# Altium PCB Gen_Func.PcbDoc
Units mm, origin at the board's own origin, x right, y up, seen from the top; angles counter-clockwise.
Board outline 152.4 x 101.6 mm, 2 copper layers (Top Layer, Bottom Layer); 88 components, 66 nets, 292 pads, 61 vias.
Unrouted connection lines stored in the file: 64.
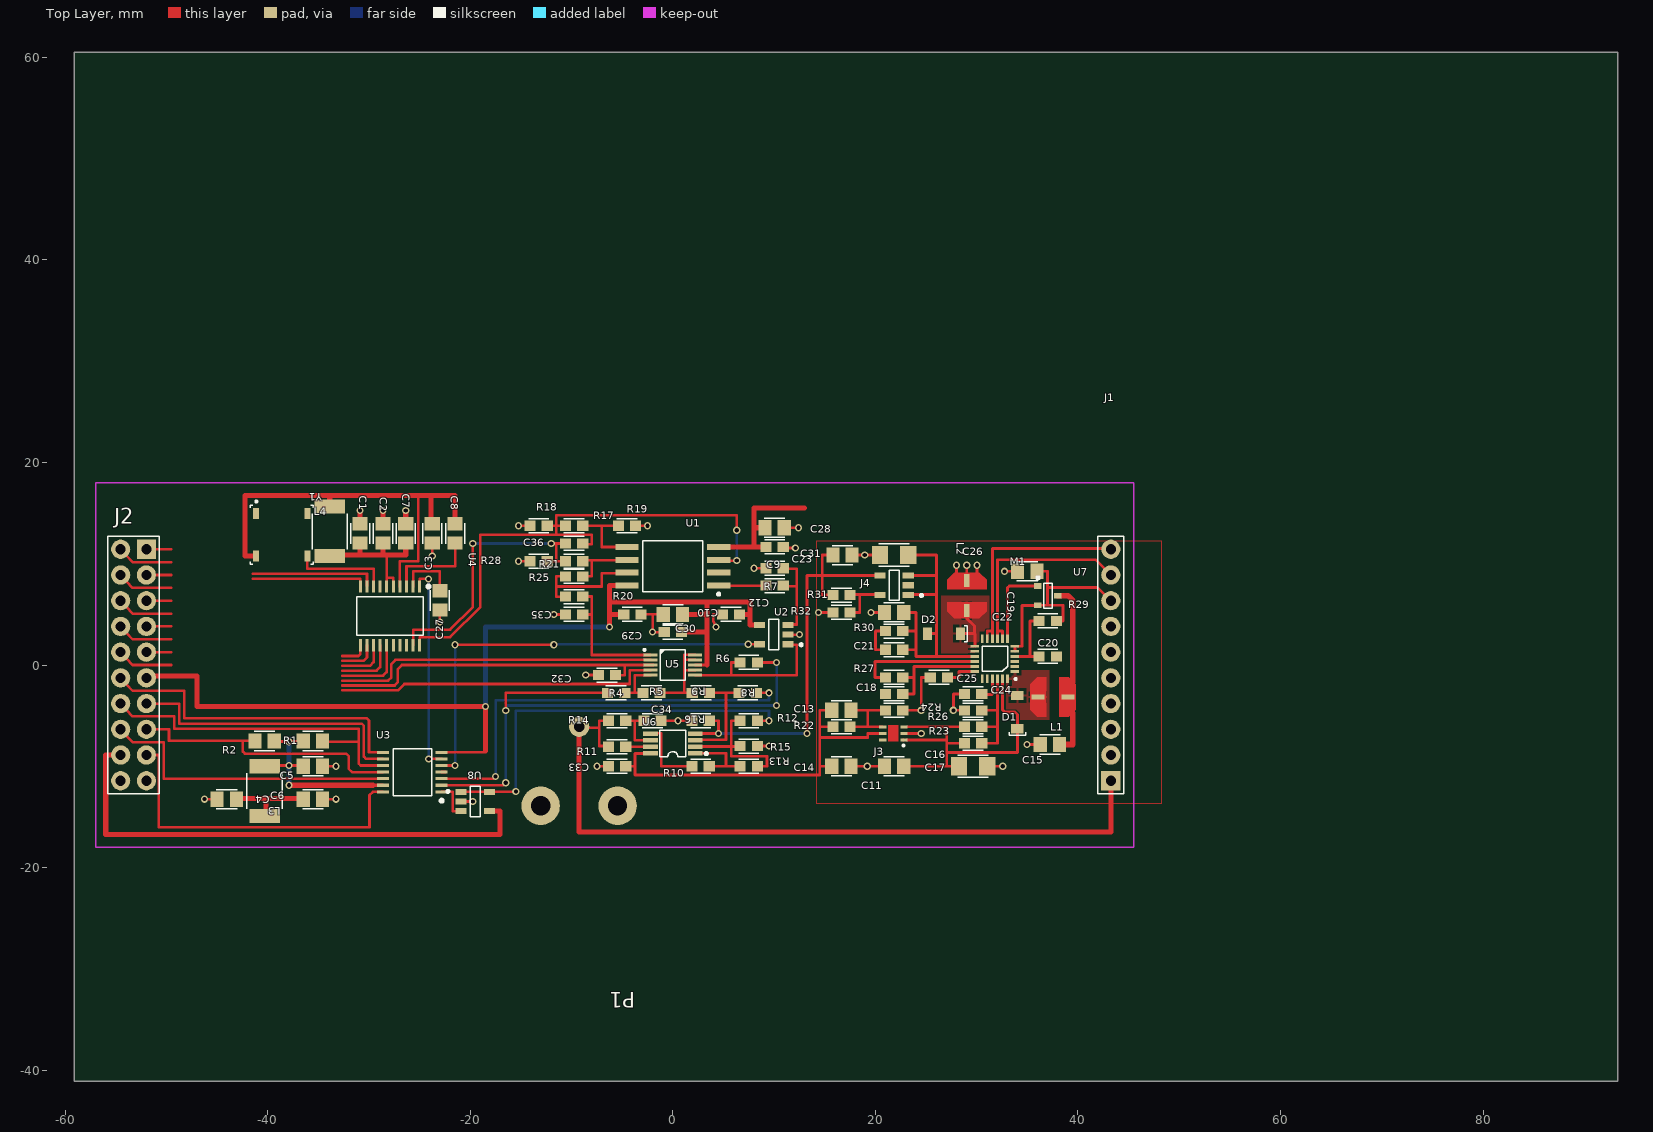
[diagram p0: Top Layer view]
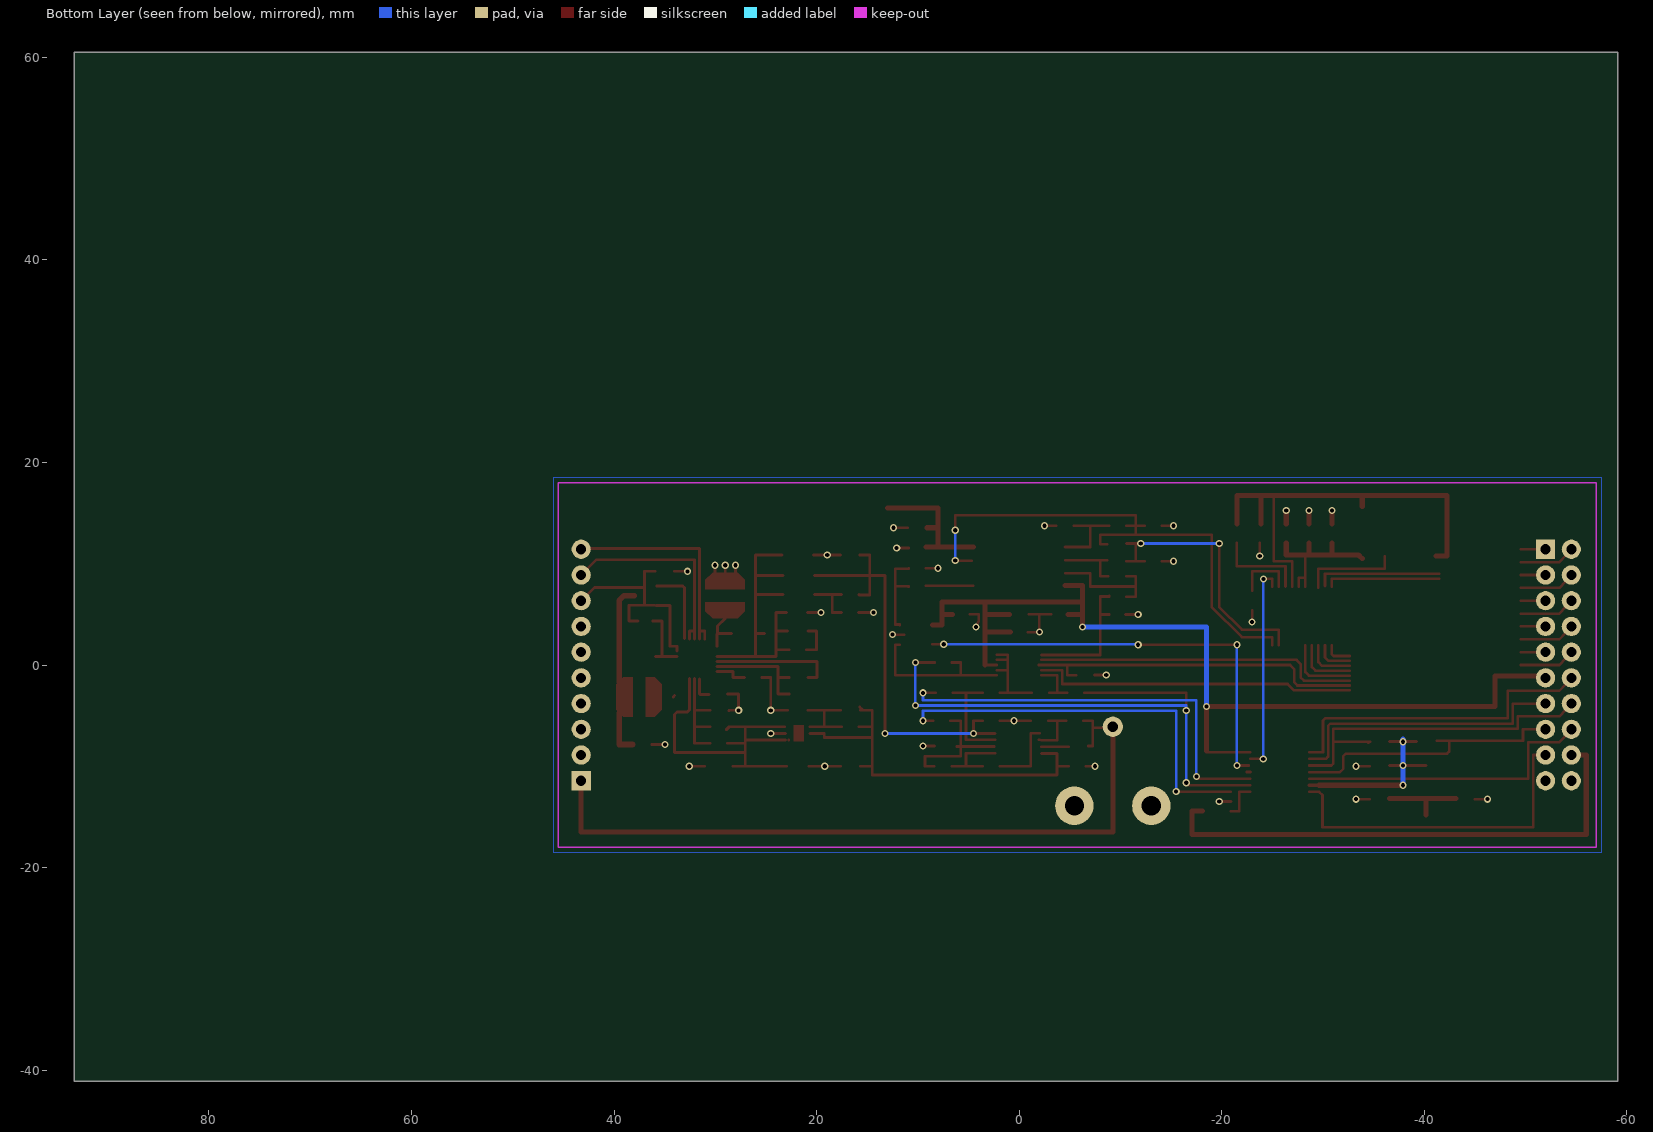
[diagram p1: Bottom Layer view, seen from below]

## Layer stack, top to bottom
Top Solder: solder mask 0.0102, Solder Resist, Dk 3.5
Top Layer: signal copper 0.0356
Dielectric 1: dielectric 0.32, FR-4, Dk 4.8
Bottom Layer: signal copper 0.0356
Bottom Solder: solder mask 0.0102, Solder Resist, Dk 3.5

## Board outline
-59.1,-41.1 93.3,-41.1 93.3,60.5 -59.1,60.5

## Design rules (kind name [scope] priority, off if disabled: settings)
Clearance [All] p1: gap=0.15
ComponentClearance [All] p1 off: gap=0.254 collisioncheckmode=3 verticalgap=0.254 showdistances=FALSE
PolygonConnect [All] p1: connectstyle=Relief reliefconductorwidth=0.254 reliefentries=4 polygonreliefangle="90 Angle" airgapwidth=0.254
RoutingVias [All] p1: holewidth=0.3 width=0.6 viastyle="Through Hole" minholewidth=0.3 minwidth=0.6 maxholewidth=6.3 maxwidth=10
SolderMaskExpansion [All] p1: expansion=0.102
UnpouredPolygon [All] p1: allowunpoured=FALSE
Width [All] p1: maxlimit=2.54 minlimit=0.102 preferedwidth=0.203 minimp=50.000000 maximp=50.000000 favimp=50.000000
28 further rules are at their usual default settings.

## Classes and differential pairs
component class Conectores: J1 J2 P1
component class Core_analógico: C9 C10 C12 C28 C29 C30 C31 C32 C33 C34 C35 C36 R4 R5 R6 R7 R8 R9 R10 R11 R12 R13 R14 R15 R16 R17 R18 R19 R20 R21 R25 R28 U1 U2 U5 U6
component class DDS: C1 C2 C3 C4 C5 C6 C7 C8 C27 L3 L4 R1 R2 U3 U4 U8 Y1
component class PowerSupply: C11 C13 C14 C15 C16 C17 C18 C19 C20 C21 C22 C23 C24 C25 C26 D1 D2 J3 J4 L1 L2 M1 R22 R23 R24 R26 R27 R29 R30 R31 R32 U7

## Components (designator, comment, footprint, x,y, rotation, side; value= is the part's Value field where it differs from the comment)
C1 "0.1μF 50V X7R" C_0805 -30.875,13 r270 top
C2 "1μF ±10% 10V Y5V" C_0805 -28.625,13 r270 top
C3 "0.1μF 50V X7R" C_0805 -23.75,13 r270 top
C4 "10uF Tantalum" C_0805 -44.05,-13.25 r180 top
C5 "0,1uF Ceramic" C_0805 -35.55,-10 r0 top
C6 "0,1uF Ceramic" C_0805 -35.55,-13.25 r0 top
C7 "0.1μF 50V X7R" C_0805 -26.375,13 r270 top
C8 "0.01μF 10V 0603 X5R" C_0805 -21.5,13 r270 top
C9 "Cap" C_0603 10.06,9.55 r180 top
C10 "6,8uF XR5 16V" C_0805 0,5 r180 top
C11 "1uF X5R" C_0805 21.85,-10 r180 top
C12 "0,1uF X5R 16V" C_0603 5.75,5 r180 top
C13 "100pF X5R" C_0805 16.65,-4.475 r0 top
C14 "2.2uF X5R" C_0805 16.65,-10 r0 top
C15 "4.7uF" C_0805 37.225,-7.85 r180 top
C16 "13pF" C_0603 29.65,-7.725 r180 top
C17 "22uF" C_1206 29.65,-10 r180 top
C18 "220nF" C_0603 21.85,-2.85 r180 top
C19 "4.7uF" C_0805 35,9.25 r180 top
C20 "100nF" C_0603 37.025,0.85 r0 top
C21 "10pF" C_0603 21.85,1.505 r180 top
C22 "2.2uF X5R" C_0805 21.85,5.195 r180 top
C23 "2.2uF X5R" C_0805 16.75,10.85 r0 top
C24 "10nF" C_0603 29.65,-2.85 r180 top
C25 "4.7nF" C_0603 26.275,-1.225 r180 top
C26 "22uF" C_1206 21.85,10.85 r180 top
C27 "0.1μF 50V X7R" C_0805 -23,6.375 r270 top
C28 "6,8uF XR5 16V" C_0805 10.06,13.555 r0 top
C29 "0,1uF X5R 16V" C_0603 0,3.25 r180 top
C30 "0,1uF X5R 16V" C_0603 -4,5 r0 top
C31 "0,1uF X5R 16V" C_0603 10.06,11.655 r0 top
C32 "0,1uF X5R 16V" C_0603 -6.5,-1 r180 top
C33 "0,1uF X5R 16V" C_0603 -5.5,-10 r180 top
C34 "0,1uF X5R 16V" C_0603 2.75,-5.5 r180 top
C35 "Cap" C_0603 -9.75,5 r180 top
C36 "Cap" C_0603 -9.75,12 r180 top
D1 "MBR1020VL" SOD-123 34.025,-4.65 r90 top
D2 "MBR0520LT1G" SOD-123 26.775,3.1 r180 top
J1 "Con10" "CONNECTOR .1 X10" 43.25,0 r90 top
J2 "Con2x10" CON2X10 -53.25,0 r270 top
J3 "TPS79901DRVR" WSON 22.825,-7.4 r90 top
J4 "TPS72301DBVR" SOT_23 21.85,7.875 r180 top
L1 "6.8uHy" L_4028 37.525,-3.15 r270 top
L2 "6.8uHy" L_4028 29.025,6.85 r0 top
L3 "742792515" L_1812 -40.3,-10 r270 top
L4 "742792515" L_1812 -33.875,10.75 r90 top
M1 "SI2323DS-T1-E3" SOT_23_Q 37.025,6.85 r270 top
P1 "BNC" BNC -9.25,-13.9 r180 top
R1 "5K" R_0805 -35.55,-7.5 r180 top
R2 "5K" R_0805 -40.3,-7.5 r0 top
R4 "1K" R_0603 -5.6,-2.75 r0 top
R5 "1K" R_0603 -2.1,-2.75 r180 top
R6 "1K" R_0603 7.5,0.25 r0 top
R7 "Res" R_0603 10.06,7.845 r0 top
R8 "Res" R_0603 7.4,-2.75 r180 top
R9 "Res" R_0603 2.775,-2.75 r0 top
R10 "Res" R_0603 2.75,-10 r180 top
R11 "PRG" R_0603 -5.5,-8.075 r180 top
R12 "Res" R_0603 7.5,-5.5 r180 top
R13 "Res" R_0603 7.5,-10 r180 top
R14 "Res" R_0603 -5.5,-5.5 r180 top
R15 "Res" R_0603 7.5,-8 r180 top
R16 "Res" R_0603 -2,-5.5 r180 top
R17 "Res" R_0603 -9.75,13.75 r0 top
R18 "200R" R_0603 -13.25,13.75 r0 top
R19 "Res" R_0603 -4.525,13.75 r180 top
R20 "Res" R_0603 -9.75,6.75 r180 top
R21 "Res" R_0603 -9.75,10.25 r180 top
R22 "1M" R_0603 16.65,-6.1 r180 top
R23 "523K" R_0603 29.65,-6.1 r0 top
R24 "250K" R_0603 21.85,-4.475 r180 top
R25 "Res" R_0603 -9.75,8.75 r0 top
R26 "110K" R_0603 29.65,-4.475 r180 top
R27 "133K" R_0603 21.85,-1.225 r0 top
R28 "200R" R_0603 -13.25,10.25 r0 top
R29 "100R" R_0603 37.025,4.35 r180 top
R30 "768K" R_0603 21.85,3.35 r0 top
R31 "1M" R_0603 16.65,6.9 r180 top
R32 "223K" R_0603 16.65,5.195 r0 top
U1 "TSH82IYDT" SOIC_8 0,9.75 r180 top
U2 "MCP6566UT-E/OT" SOT_23 9.975,3 r180 top
U3 "MAX5814AUD+" TSSOP_14 -25.725,-10.575 r180 top
U4 "AD9834BRU" TSSOP_20 -25,7.75 r270 top
U5 "OPA2889IDGSR" MSOP_10 0,0 r0 top
U6 "LMH6658MM/NOPB" VSSOP_8 0,-7.75 r180 top
U7 "TPS65131RGER" VQFN-N24 33.775,-0.65 r180 top
U8 "MCP6001T-I/OT" SOT_23 -19.5,-13.475 r0 top
Y1 "XTAL" XTAL_4 -38.625,12.85 r180 top

## Footprints (in the part's own frame and the unit in brackets; to place one, negate y for a bottom-side part, rotate by r counter-clockwise, add the part's x,y. Pads: shape width x height; smd on the part's side, far side on the other; paste and mask are expansions set on the pad)
BNC [mm] "BNC Connector"
  round 2 hole 1.02: 1(0,-7.8)
  round 3.8 hole 1.9: 2(-3.8,0) 2(3.8,0)
C_0603 [mm]
  rect 1.1x1 smd: 1(-0.85,0) 2(0.85,0)
  silkscreen extent -1,-0.69 1,0.69
C_0805 [mm]
  rect 1.3x1.5 smd: 1(-0.95,0) 2(0.95,0)
  silkscreen extent -1.02,-0.95 1.02,0.95
C_1206 [mm]
  rect 1.6x1.8 smd: 1(-1.4,0) 2(1.4,0)
  silkscreen extent -1.5,-1.1 1.5,1.1
CON2X10 [mm]
  rect 1.9x1.9 hole 1: 1(-11.43,1.27)
  round 1.9 hole 1: 2(-8.89,1.27) 3(-6.35,1.27) 4(-3.81,1.27) 5(-1.27,1.27) 6(1.27,1.27) 7(3.81,1.27) 8(6.35,1.27) 9(8.89,1.27) 10(11.43,1.27) 11(-11.43,-1.27) 12(-8.89,-1.27) 13(-6.35,-1.27) 14(-3.81,-1.27) 15(-1.27,-1.27) 16(1.27,-1.27) 17(3.81,-1.27) 18(6.35,-1.27) 19(8.89,-1.27) 20(11.43,-1.27)
  silkscreen extent -12.7,-2.54 12.7,2.54
"CONNECTOR .1 X10" [mm]
  rect 1.9x1.9 hole 1: 1(-11.43,0)
  round 1.9 hole 1: 2(-8.89,0) 3(-6.35,0) 4(-3.81,0) 5(-1.27,0) 6(1.27,0) 7(3.81,0) 8(6.35,0) 9(8.89,0) 10(11.43,0)
  silkscreen extent -12.7,-1.27 12.7,1.27
L_1812 [mm]
  rect 1.4x3 smd: 1(0,0) 2(4.9,0)
  silkscreen extent 0.7,-1.75 4.2,1.75
L_4028 [mil] "Inductor, 2-Leads"
  rect 20x50 smd: 1(0,58.31) 2(0,-58.31)
  Top Layer region: -76.77,25.59 76.77,25.59 76.77,61.02 49.21,88.58 -49.21,88.58 -76.77,61.02
  Top Layer region: -76.77,-25.59 76.77,-25.59 76.77,-61.02 49.21,-88.58 -49.21,-88.58 -76.77,-61.02
MSOP_10 [mm]
  rect 1.4x0.3 smd mask+0.05: 1(-2.2,1) 2(-2.2,0.5) 3(-2.2,0) 4(-2.2,-0.5) 5(-2.2,-1) 6(2.2,-1) 7(2.2,-0.5) 8(2.2,0) 9(2.2,0.5) 10(2.2,1)
  silkscreen extent -2.9,-1.5 1.25,1.6
R_0603 [mm]
  rect 1.1x1 smd: 1(-0.85,0) 2(0.85,0)
  silkscreen extent -1,-0.69 1,0.69
R_0805 [mm]
  rect 1.3x1.5 smd: 1(-0.95,0) 2(0.95,0)
  silkscreen extent -1.02,-0.95 1.02,0.95
SOD-123 [mm] "SOD-123, 2-Leads"
  rect 0.91x1.22 smd: 1(-1.635,0) 2(1.635,0)
  silkscreen extent -2.3,-0.8 -2,0.8
SOIC_8 [mm] "SOIC, 8-Leads, Body 4,90x3,90mm, Pitch 1,27mm, IPC Medium Density"
  rect 2.3x0.6 smd: 1(-4.525,1.905) 2(-4.525,0.635) 3(-4.525,-0.635) 4(-4.525,-1.905) 5(4.525,-1.905) 6(4.525,-0.635) 7(4.525,0.635) 8(4.525,1.905)
  silkscreen extent -4.65,-2.5 2.98,2.88
SOT_23 [mm] "SOT 23, 5 leads"
  rect 1.1x0.6 smd: 1(-1.4,0.95) 2(-1.4,0) 3(-1.4,-0.95) 4(1.4,0.95) 5(1.4,-0.95)
  silkscreen extent -2.83,-1.5 0.5,1.5
SOT_23_Q [mil] "SOT 23, 3 leads"
  rect 22x29 smd: 1(-37.5,-39) 2(37.5,-39) 3(0,39)
  silkscreen extent -74,-43 48,17
TSSOP_14 [mm] "TSSOP_14, 14-Leads"
  rect 1.2x0.3 smd: 1(-2.9,1.95) 2(-2.9,1.3) 3(-2.9,0.65) 4(-2.9,0) 5(-2.9,-0.65) 6(-2.9,-1.3) 7(-2.9,-1.95) 8(2.9,-1.95) 9(2.9,-1.3) 10(2.9,-0.65) 11(2.9,0) 12(2.9,0.65) 13(2.9,1.3) 14(2.9,1.95)
  silkscreen extent -3.05,-2.32 1.9,2.97
TSSOP_20 [mm] "TSSOP, 20-Leads"
  rect 1.2x0.3 smd: 1(0,0) 2(0,-0.65) 3(0,-1.3) 4(0,-1.95) 5(0,-2.6) 6(0,-3.25) 7(0,-3.9) 8(0,-4.55) 9(0,-5.2) 10(0,-5.85) 11(5.8,-5.85) 12(5.8,-5.2) 13(5.8,-4.55) 14(5.8,-3.9) 15(5.8,-3.25) 16(5.8,-2.6) 17(5.8,-1.95) 18(5.8,-1.3) 19(5.8,-0.65) 20(5.8,0)
  silkscreen extent -0.15,-6.23 4.8,1.02
VQFN-N24 [mm] "QFN, 24-Leads"
  rect 0.85x0.28 smd: 1(0,0) 1(0,0) 2(0,-0.5) 3(0,-1) 4(0,-1.5) 5(0,-2) 6(0,-2.5) 13(3.95,-2.5) 14(3.95,-2) 15(3.95,-1.5) 16(3.95,-1) 17(3.95,-0.5) 18(3.95,0)
  rect 0.28x0.85 smd: 7(0.725,-3.225) 8(1.225,-3.225) 9(1.725,-3.225) 10(2.225,-3.225) 11(2.725,-3.225) 12(3.225,-3.225) 19(3.225,0.725) 20(2.725,0.725) 21(2.225,0.725) 22(1.725,0.725) 23(1.225,0.725) 24(0.725,0.725)
  silkscreen extent -0.15,-2.52 3.23,0.8
VSSOP_8 [mm] "VSSOP, 8-Leads"
  rect 1.45x0.45 smd mask+0.05: 1(-2.2,0.975) 2(-2.2,0.325) 3(-2.2,-0.325) 4(-2.2,-0.975) 5(2.2,-0.975) 6(2.2,-0.325) 7(2.2,0.325) 8(2.2,0.975)
  silkscreen extent -3.43,-1.3 1.3,1.3
WSON [mm] "Plastic Small Outline No Lead, 6-Lead"
  rect 0.3x0.7 smd: 1(0,0) 2(0.65,0) 3(1.3,0) 4(1.3,2.1) 5(0.65,2.1) 6(0,2.1)
  Top Layer region: -0.15,0.55 -0.15,1.55 1.45,1.55 1.45,0.55
  silkscreen extent -0.65,-0.05 -0.45,0.15
XTAL_4 [mm] "Crystal, 4-SMD, 7x6mm"
  rect 0.6x1.1 smd: 1(2.54,-2.1) 2(-2.54,-2.1) 3(-2.54,2.1) 4(2.54,2.1)
  silkscreen extent -3.11,-3.4 3.11,2.92

## Part data
C1 C2 C3 C4 C5 C6 C7 C8 C10 C11 C12 C13 C14 C15 C16 C17 C18 C19 C20 C21 C22 C23 C24 C25 C26 C27 C28 C29 C30 C31 C32 C33 C34: library part Cap, "Capacitor"
C9 C35 C36: "Capacitor"
D1 D2: library part Diode, "Schottky diode"
J1: "Connector x10"
J2: "Connector 2x10"
J3 J4: library part LDO, "LDO_Adjustable"
L1 L2: library part Ind, "Inductor"
L3 L4: library part Ferrite, "Ferrite Bead"
M1: library part PMOS, "Transistor"
P1: "BNC Elbow Connector"
R1 R2 R4 R5 R6 R11 R18 R22 R23 R24 R26 R27 R28 R29 R30 R31 R32: library part Res, "Resistor"
R7 R8 R9 R10 R12 R13 R14 R15 R16 R17 R19 R20 R21 R25: "Resistor"
U1 U6: library part OpAmp_x2, "OpAmp_x2"
U2: library part Comp, "Comparator"
U3: library part DAC_14Leads, "DAC x4 I2C"
U4: library part DDS, "DDS 50MHz"
U5: library part OpAmp_Dis, "OpAmp_Disable_x2"
U7: "Positive and Negative Output DC-DC Converter"
U8: library part OpAmp, "OpAmp"
Y1: "Crystal oscillator"

## Via types
v1: diameter 0.711, hole 0.406, Top Layer to Bottom Layer, 61 vias

## Nets (pads, with @x,y where several pads share a name; then routed paths per layer and width w, separated by ;. In a path a pad name is that pad's centre, name@x,y a point inside that pad or via, vN(x,y) a via of type N, cw(c..) or ccw(c..) an arc to the next point about the centre after c; other vN are vias at no path point)
+6V5: C11.1 C16.2 C17.2 D1.1 J3.1 J3.3 R23.1 U7.23 | length 36.2
  Top Layer w0.28: C11.1@22.975,-10 C17.2 ; J3.1@23.075,-7.4 27.05,-7.4 ; J3.3@23.15,-6.1 27.05,-6.1 ; 27.05,-9.9 27.05,-8.65 ; C16.2 27.05,-7.725 ; R23.1@28.925,-6.4 28.625,-6.1 27.05,-6.1 ; U7.23@32.55,-1.34 32.55,-4.425 32.775,-4.65 33.775,-4.65 34.025,-4.9 D1.1 34.025,-8.65 27.05,-8.65 ; 27.05,-8.65 27.05,-7.725 ; 27.05,-7.725 27.05,-7.4 ; 27.05,-7.4 27.05,-6.1
-6V5: C21.1 C22.1 C26.1 D2.2 J4.1 J4.3 R30.2 U7.15 | length 32.5
  Top Layer w0.28: C21.1 24.025,1.505 ; R30.2@22.875,3.35 24.025,3.35 ; C22.1@22.975,5.195 24.025,5.195 ; J4.1@23.325,6.95 26.025,6.95 ; J4.3@23.325,8.85 26.025,8.85 ; C26.1@23.425,10.85 26.025,10.85 26.025,8.85 ; 24.025,5.1 24.025,1.35 24.025,0.85 U7.15 ; D2.2 26.025,3.1 ; 26.025,0.85 26.025,3.1 ; 26.025,3.1 26.025,8.85
AGND: C1.1 C2.1 C3.2 C4.2 C5.2 C6.2 C7.1 C9.2 C10.2 C11.2 C12.2 C14.2 C15.2 C17.1 C18.2 C19.2 C20.2 C22.2 C23.2 C24.2 C25.2 C26.2 C27.2 C28.2 C29.2 C30.2 C31.2 C32.2 C33.2 C34.2 C35.2 J2.10 J2.20 J3.2 J4.2 L2.1 P1.2 R15.1 R16.1 R18.1 R19.1 R24.1 R26.2 R28.1 R32.1 U2.2 U3.4 U4.7 U4.18 U7.2 U7.3 U7.19 U8.2 Y1.2 | length 65.8
  Top Layer w0.254: v1(-46.25,-13.25) C4.2 ; v1(-23.75,10.75) C3.2 ; v1(-23,4.25) C27.2 ; v1(-15.25,10.25) R28.1 ; v1(-15.25,13.75) R18.1 ; v1(-7.5,-10) C33.2@-6.6,-10 ; R19.1 v1(-2.5,13.75) ; C30.2 -2,5 ; C10.2 -2,5 ; C29.2 v1(-2,3.25) -2,5 ; v1(4.25,3.75) 4,4.375 4,5 C12.2 ; U2.2 v1(12.5,3) ; v1(32.75,9.25) C19.2
  Top Layer w0.28: C6.2 v1(-33.25,-13.25) ; C5.2 v1(-33.25,-10) ; U3.4 U3.4@-22.475,-10.575 ; U8.2 v1(-19.75,-13.475) ; v1(-11.75,5) C35.2@-10.507,5 ; v1(-8.6,-1) C32.2@-7.45,-1 ; R16.1 C34.2 ; v1(8.02,9.55) C9.2 ; R15.1 v1(9.5,-8) ; C31.2@10.91,11.555 v1(12.097,11.555) ; C28.2 v1(12.42,13.555) ; v1(14.375,5.195) R32.1@15.825,5.195 ; R32.1@15.825,5.208 R32.1@15.85,5.183 ; C14.2@17.65,-10 v1(19.2,-10) C11.2@20.75,-10 ; C23.2@17.65,10.85 v1(18.95,10.85) C26.2@20.3,10.85 ; v1(19.575,5.195) C22.2 ; R24.1@22.875,-4.475 v1(24.525,-4.475) 24.525,-1.225 C25.2 ; J3.2@23.075,-6.75 v1@24.425,-6.75 ; 28.025,8.1 28.025,8.331 ; v1(28.025,9.85) 28.025,8.331 ; R26.2@28.675,-4.525 28.625,-4.475 v1(27.7,-4.475) 27.7,-2.85 C24.2 ; v1(29.025,9.85) L2.1 ; v1(30.025,9.85) 30.025,8.1 29.025,8.1 L2.1 ; C17.1 v1(32.575,-10) ; v1(34.975,-7.85) C15.2 ; 28.025,8.331 L2.1
  Top Layer w0.508: C1.1 v1(-30.875,15.25) ; C2.1 v1(-28.625,15.25) ; C7.1 v1(-26.375,15.25)
  other v1: 24.525,-6.75 0.5,-5.5
AVCC3V0: C3.1 C4.1 C6.1 C8.1 C10.1 C12.1 C29.1 C30.1 J2.6 J2.19 L3.2 L4.2 U1.8 U2.5 U3.7 U4.4 U5.8 U8.5 Y1.4 | length 208.3
  Top Layer w0.254: U4.4 -26.95,10.25 -25.125,10.25 -25.125,16.75 ; U3.7 -18.625,-8.625 -18.5,-8.5 ; U5.8 3.375,0
  Top Layer w0.508: J2.19 -56,-8.89 -56,-16.75 -17.075,-16.75 -17.075,-14.425 U8.5 ; J2.6 -51.81,-1.1 -47,-1.1 -47,-4.102 v1(-18.5,-4.102) -18.5,-8.5 ; C4.1@-43.125,-13.175 -40.175,-13.175 ; Y1.4 -42.25,10.75 -42.25,16.75 -25.125,16.75 -23.875,16.75 ; L3.2@-40.175,-14.825 -40.175,-13.175 ; C6.1@-36.575,-13.175 -40.175,-13.175 ; L4.2 -33.875,16.75 ; C3.1@-23.875,13.95 -23.875,16.75 ; C8.1 -21.5,16.75 -23.875,16.75 ; v1(-6.25,3.75) -6.25,5 ; C30.1 -6.25,5 ; U1.8 -6.25,7.845 -6.25,6.208 ; C29.1 3.375,3.25 ; C10.1 3.375,5 ; 3.375,0 3.375,3.25 ; C12.1 7.625,5 ; U2.5 7.625,3.95 7.625,5 ; -6.25,5 -6.25,6.208 ; -6.25,6.208 3.375,6.208 ; 3.375,3.25 3.375,5 ; 3.375,5 3.375,6.208 ; 3.375,6.208 7.625,6.208 7.625,5
  Bottom Layer w0.508: v1(-18.5,-4.102) -18.5,3.75 v1(-6.25,3.75)
AVCC6V0: C13.1 C14.1 C33.1 J3.5 R22.2 U6.8 | length 40.1
  Top Layer w0.28: C33.1@-4.9,-10 -3.75,-10 ; U6.8 -3.75,-8.725 -3.75,-10 ; 14.5,-10 C14.1 ; C13.1@15.5,-4.4 C13.1@15.75,-4.15 ; C13.1 14.5,-4.475 14.5,-6.1 ; R22.2 14.5,-6.1 ; J3.5@20.65,-6.75 19.25,-6.75 19.25,-7.15 14.5,-7.15 ; -3.75,-10 -3.75,-10.85 14.5,-10.85 14.5,-7.15 ; 14.5,-7.15 14.5,-6.1
AVCC-3V0: C28.1 C31.1 C32.1 J2.5 U1.4 U5.3 | length 51
  Top Layer w0.254: J2.5 -49.53,1.27 ; -32.625,-2.024 -27.476,-2.024 -27.152,-1.7 -27.152,-0.404 -26.748,0 -4.75,0 ; C32.1 -4.75,-1 -4.75,0 ; U5.3@-1.95,0 U5.3 -4.75,0
  Top Layer w0.508: U1.4 C31.1 ; 8,11.875 8,13.555 ; C28.1 8,13.555 ; 12.99,15.5 8,15.5 8,13.555
AVCC-6V0: C23.1 C34.1 J4.5 R31.2 U6.4 | length 41.6
  Top Layer w0.28: U6.4@2.375,-6.75 3.4,-6.75 v1(4.5,-6.75) 4.5,-5.5 C34.1 ; v1(13.25,-6.75) 13.25,-6.5 13.25,8.85 14.75,8.85 ; C23.1@15.75,10.85 14.75,10.85 14.75,8.85 ; R31.2@15.8,6.95 R31.2 14.75,6.9 14.75,8.85 ; J4.5@20.2,8.85 14.75,8.85
  Bottom Layer w0.28: v1(4.5,-6.75) v1(13.25,-6.75)
DAC_AMP_CUAD: R4.1 R6.2 U3.2 | length 58.9
  Top Layer w0.254: U3.2 -16.746,-11.875 v1(-16.5,-11.629) v1@-16.5,-11.815 ; v1(-16.5,-4.5) -16.5,-2.75 R4.1 ; R6.2 v1(10.25,0.25)
  Bottom Layer w0.254: v1(-16.5,-11.629) v1(-16.5,-4.5) -16.5,-4 v1(10.25,-4) v1(10.25,0.25)
DAC_AMP_TRIANG: U3.6 U4.1 | length 20.6
  Top Layer w0.254: U4.1 -25,8.5 v1(-24.125,8.5) ; v1(-24.1,-9.275) U3.6
  Bottom Layer w0.254: v1@-24.1,-9.025 v1@-24.1,8.65
DAC_DUTY_CUAD: U2.4 U3.5 | length 43.4
  Top Layer w0.254: U3.5@-22.65,-9.925 v1(-21.5,-9.925) ; v1(-21.5,2) v1(-11.75,2) v1@-11.825,1.925 ; v1(7.45,2.05) U2.4
  Bottom Layer w0.254: v1(-21.5,2) v1(-21.5,-9.925) v1@-21.425,-10 ; v1(-11.75,2) -11.75,2.05 v1(7.45,2.05)
DAC_OFFSET: R8.1 U3.3 | length 41.9
  Top Layer w0.254: U3.3 -22.8,-11.25 -17.75,-11.25 v1(-17.5,-11) ; R8.1 v1(9.5,-2.75)
  Bottom Layer w0.254: v1(-17.5,-11) -17.5,-3.5 9.5,-3.5 v1(9.5,-2.75)
DAC_VREF: R12.1 U8.1 U8.4 | length 40.5
  Top Layer w0.254: U8.1 U8.4 ; v1(-15.5,-12.5) U8.4@-18.075,-12.5 ; R12.1@8.5,-5.5 v1(9.5,-5.5) ; U8.4 U8.4@-18.075,-12.5 ; U8.4 -18.1,-12.5 U8.4@-18.075,-12.5
  Bottom Layer w0.254: v1(-15.5,-12.5) -15.5,-4.5 9.5,-4.5 v1(9.5,-5.5)
DDS_IOUT: C9.1 R7.2 U2.3 | length 8.7
  Top Layer w0.254: R7.2@10.91,7.795 12.25,7.795 ; C9.1 10.91,9.5 12.25,9.5 12.25,7.795 ; U2.3@11.797,3.95 11.797,4 12.25,4 12.25,7.795
MCLK: U4.8 Y1.3 | length 9.7
  Top Layer w0.254: Y1.3 -36.085,9.5 -29.55,9.5 U4.8@-29.55,7.625
NetC1_2: C1.2 C2.2 C7.2 L4.1 U4.5 U4.6 | length 15.6
  Top Layer w0.254: U4.6 -28.25,8.625 ; -28.25,10.875 -28.25,8.625 ; U4.5 -27.6,8.625 -28.25,8.625
  Top Layer w0.508: L4.1@-33.875,10.5 -33.5,10.875 -28.25,10.875 -26.375,10.875 C7.2 ; -30.875,11 C1.2 ; -28.625,11 C2.2
NetC5_1: C5.1 L3.1 R1.2 R2.2 U3.13 | length 20.1
  Top Layer w0.3: L3.1@-40.175,-9.925 v1(-37.9,-9.925) C5.1@-36.575,-9.925 ; R2.2@-39.225,-7.575 v1(-37.9,-7.575) R1.2@-36.575,-7.575 ; -29.625,-11.875 U3.13
  Top Layer w0.508: v1(-37.9,-11.875) -29.625,-11.875
  Bottom Layer w0.508: v1(-37.9,-11.875) v1(-37.9,-9.925) v1@-37.9,-7.325
NetC8_2: C8.2 U4.3 | length 9.1
  Top Layer w0.254: U4.3 -26.3,9.75 -21.5,9.75 C8.2
NetC13_2: C13.2 J3.4 R22.1 R24.2 | length 7.9
  Top Layer w0.28: R22.1@17.55,-6.1 19.25,-6.1 ; C13.2@17.65,-4.475 19.25,-4.475 ; J3.4@20.65,-6.1 19.25,-6.1 ; R24.2@20.85,-4.475 19.25,-4.475 ; 19.25,-6.1 19.25,-4.475
NetC15_1: C15.1 L1.1 M1.3 | length 16.3
  Top Layer w0.559: M1.3 39.025,6.85 39.5,6.375 39.5,-1.65 38.775,-2.375 L1.1@38.775,-2.919 ; C15.1 39.5,-7.85 39.5,-4.75 39.25,-4.5 39.25,-4.25
NetC16_1: C16.1 R23.2 R26.1 U7.22 | length 11
  Top Layer w0.28: C16.1 32.05,-7.725 32.05,-6.1 ; R23.2 32.05,-6.1 ; R26.1 32.05,-4.475 ; U7.22@32.05,-1.34 32.05,-4.475 ; 32.05,-6.1 32.05,-4.475
NetC18_1: C18.1 R27.2 U7.17 | length 10.9
  Top Layer w0.28: C18.1 23.8,-2.85 23.8,-1.225 ; R27.2 23.8,-1.225 ; U7.17 23.8,-0.15 23.8,-1.225
NetC20_1: C20.1 R29.2 U7.4 | length 6.5
  Top Layer w0.28: U7.4 C20.1@35.925,0.85 ; 35.275,0.885 35.275,4.35 R29.2
NetC21_2: C21.2 R27.1 R30.1 U7.16 | length 16.1
  Top Layer w0.28: 19.95,0.35 19.95,0.315 ; R27.1@20.85,-1.225 19.95,-1.225 19.95,0.315 ; R30.1@20.85,3.35 20,3.35 20,1.505 C21.2 ; U7.16 19.985,0.35 19.95,0.315
NetC24_1: C24.1 U7.21 | length 2.4
  Top Layer w0.28: C24.1@30.625,-2.9 31.525,-2.9 31.55,-2.875 U7.21
NetC25_1: C25.1 U7.18 | length 3.3
  Top Layer w0.28: C25.1 28.25,-1.225 28.25,-0.65 U7.18
NetC27_1: C27.1 U4.2 | length 6.1
  Top Layer w0.254: U4.2 -25.65,9.25 -23,9.25 C27.1
NetC35_1: C35.1 R20.1 U5.1 | length 13.4
  Top Layer w0.28: C35.1 -8,5 ; R20.1@-8.9,6.843 R20.1 -8,6.75 -8,5 ; U5.1 -3,1 -4,1 -8,1 -8,5
NetC36_1: C36.1 R17.1 R18.2 U1.3 U4.20 | length 55.4
  Top Layer w0.254: U4.20 -25,2.75 -22,2.75 -19,5.75 -19,12.875 -11.5,12.875 ; R18.2 -11.5,13.75 ; R17.1 -11.5,13.75 ; C36.1@-8.705,11.923 -8,11.923 -8,12.875 -11.5,12.875 ; U1.3@4.685,10.29 U1.3@4.685,10.305 ; U1.3@4.7,10.305 v1(6.31,10.305) ; v1(6.31,13.305) 6.31,14.78 -11.496,14.78 -11.5,14.75 -11.5,13.75 ; -11.5,12.875 -11.5,13.75
  Bottom Layer w0.254: v1(6.31,10.305) v1(6.31,13.305)
NetC36_2: C36.2 R21.2 R28.2 U4.19 | length 27.3
  Top Layer w0.254: U4.19 -25.65,3.5 -22,3.5 -19.75,5.75 v1(-19.75,12) ; R28.2 R21.2 ; v1(-12,12) -11.5,12 ; -11.5,10.25 -11.5,12 ; C36.2 -11.5,12
  Bottom Layer w0.254: v1(-19.75,12) v1(-12,12)
NetD1_2: D1.2 L1.2 U7.1 U7.24 | length 0.2
  Top Layer w0.28: D1.2 D1.2@34.16,-3.15
NetD2_1: D2.1 L2.2 U7.13 U7.14 | length 5.2
  Top Layer w0.28: D2.1 29.775,3.1 ; L2.2 29.025,4.6 29.775,3.85 29.775,3.1 ; U7.13 29.825,3.05 29.775,3.1
NetJ1_1: J1.1 P1.1 R11.2 R14.2 | length 72.9
  Top Layer w0.254: P1.1@-8.5,-6.2 -7.3,-6.2 ; R11.2@-6.8,-8 -7.25,-8 -7.25,-5.5 R14.2
  Top Layer w0.508: P1.1@-9.25,-6.2 -9.25,-16.5 43.25,-16.5 J1.1
NetJ1_9: J1.9 U7.8 U7.9 | length 20.9
  Top Layer w0.254: 32.05,10.4 41.74,10.4 J1.9
  Top Layer w0.28: U7.9 32.05,3.35 ; 32.05,10.4 32.05,3.35 ; U7.8 32.55,3.35 32.05,3.35
NetJ1_10: J1.10 U7.10 U7.11 | length 21.9
  Top Layer w0.28: U7.11 31.05,3.35 31.55,3.35 ; U7.10 31.55,3.35 ; J1.10 43.18,11.5 31.55,11.5 31.55,3.35
NetJ2_1: J2.1 U4.9 | length 14.9
  Top Layer w0.254: J2.1 -49.53,11.43 ; -41.5,9 -30.2,9 U4.9@-30.2,7.8
NetJ2_2: J2.2 U4.11 | length 5.2
  Top Layer w0.254: J2.2 -49.53,8.89 ; -32.625,0.892 -31.04,0.892 -30.85,1.082 U4.11
NetJ2_3: J2.3 U4.13 | length 7.3
  Top Layer w0.254: J2.3 -49.53,6.35 ; -32.625,-0.08 -29.906,-0.08 -29.55,0.276 U4.13
NetJ2_4: J2.4 U4.15 | length 9.6
  Top Layer w0.254: J2.4 -49.53,3.81 ; -32.625,-1.052 -28.61,-1.052 -28.25,-0.692 U4.15
NetJ2_7: J2.7 U3.9 | length 28.6
  Top Layer w0.254: J2.7 -48.75,-3.81 -48.75,-5.8 -30.7,-5.8 -30.5,-6 -30.5,-9.05 -30.275,-9.275 U3.9
NetJ2_8: J2.8 R2.1 U3.11 | length 28.3
  Top Layer w0.254: J2.8 -49.75,-6.35 -49.75,-7.5 -42.45,-7.5 ; R2.1 -42.45,-7.5 ; U3.11 -31.675,-10.575 -32,-10.25 -32,-9 -32.25,-8.75 -42.25,-8.75 -42.45,-8.55 -42.45,-7.5
NetJ2_9: J2.9 U3.14 | length 33.7
  Top Layer w0.254: J2.9 -50.75,-8.89 -50.75,-16 -29.95,-16 -29.95,-12.85 -29.625,-12.525 U3.14
NetJ2_11: J2.11 U4.10 | length 16.9
  Top Layer w0.254: J2.11 -53.34,10.16 -49.53,10.16 ; -41.5,8.5 -30.85,8.5 U4.10
NetJ2_12: J2.12 U4.12 | length 9.3
  Top Layer w0.254: J2.12 -53.34,7.62 -49.53,7.62 ; -32.625,0.406 -30.554,0.406 -30.2,0.76 U4.12
NetJ2_13: J2.13 U4.14 | length 11.6
  Top Layer w0.254: J2.13 -53.34,5.08 -49.53,5.08 ; -32.625,-0.566 -29.258,-0.566 -28.9,-0.208 U4.14
NetJ2_16: J2.16 U3.8 | length 32.4
  Top Layer w0.254: J2.16 -53.34,-2.54 -48.25,-2.54 -48.25,-5.25 -30.25,-5.25 -30,-5.5 -30,-8.625 U3.8
NetJ2_17: J2.17 R1.1 U3.10 | length 35.1
  Top Layer w0.254: J2.17 -53.34,-5.08 -49.25,-5.08 -49.25,-6.275 -31,-6.275 -31,-9.75 -30.825,-9.925 U3.10 ; R1.1@-34.482,-7.691 -34.675,-7.575 -31,-7.575
NetJ2_18: J2.18 U3.12 | length 30.1
  Top Layer w0.254: J2.18 -53.34,-7.62 -50.25,-7.62 -50.25,-11.225 U3.12
NetJ4_4: J4.4 R31.1 R32.2 | length 5.3
  Top Layer w0.28: R32.2@17.55,5.195 18.45,5.195 18.45,6.95 ; R31.1@17.55,6.95 18.45,6.95 ; J4.4@20.2,6.95 18.45,6.95
NetM1_1: M1.1 U7.7 | length 7.8
  Top Layer w0.28: U7.7@33.05,2.61 33.05,7.625 33.227,7.803 M1.1@35.784,7.803
NetR4_2: R4.2 R5.2 U5.5 | length 5.1
  Top Layer w0.254: R4.2 R5.2 ; -3.75,-2.75 -3.75,-1 U5.5
NetR5_1: R5.1 R9.1 U5.7 U5.9 U5.10 | length 10.1
  Top Layer w0.254: R5.1 0.9,-2.75 R9.1 ; 1.125,-2.75 1.125,1 U5.10 ; 1.125,-0.5 U5.7 ; 1.125,0.5 U5.9
NetR6_1: R6.1 U2.1 U5.6 | length 15.6
  Top Layer w0.254: U5.6@2.2,-0.995 5.75,-0.995 ; R6.1 5.75,0.25 5.75,-0.995 ; U2.1@11.797,2 12.25,2 12.25,-0.995 5.75,-0.995
NetR7_1: R7.1 U1.1 U1.2 | length 4.7
  Top Layer w0.254: U1.1 R7.1
NetR8_2: R8.2 R9.2 U6.3 | length 10.4
  Top Layer w0.254: U6.3@2.375,-7.4 5.25,-7.4 5.25,-2.75 ; R9.2 R8.2
NetR10_1: R10.1 R13.2 U6.1 | length 8.3
  Top Layer w0.254: U6.1@2.375,-8.7 5.25,-8.7 5.25,-10 R10.1 ; 4.15,-10 R13.2
NetR10_2: R10.2 U6.5 | length 7.2
  Top Layer w0.254: U6.5@-2.025,-6.75 -1.125,-6.75 -1.125,-10 R10.2
NetR11_1: R11.1 U6.7 | length 2.7
  Top Layer w0.254: R11.1@-4.9,-8.075 U6.7
NetR12_2: R12.2 R13.1 R15.2 U6.2 | length 13.7
  Top Layer w0.254: U6.2@2.475,-8.05 R15.2@6.175,-8.05 ; R12.2@6.825,-5.5 5.75,-5.5 5.75,-9 9.3,-9 9.3,-10 R13.1@8.4,-10
NetR14_1: R14.1 R16.2 U6.6 | length 5.4
  Top Layer w0.254: R14.1 R16.2 ; -3.75,-5.5 -3.75,-7.425 U6.6 ; U6.6@-2.025,-7.4 U6.6@-1.925,-7.4
NetR17_2: R17.2 R19.2 U1.5 | length 8.1
  Top Layer w0.254: R17.2 -7,13.75 ; R19.2 -7,13.75 ; U1.5 -7,11.655 -7,13.75
NetR20_2: R20.2 R25.1 U1.7 | length 12.1
  Top Layer w0.254: R20.2 -11.5,6.75 -11.5,7.75 ; R25.1 -11.5,8.75 -11.5,7.75 ; U1.7@-4.545,9.065 -7,9.065 -7,7.75 -11.5,7.75
NetR21_1: R21.1 R25.2 U1.6 | length 6.6
  Top Layer w0.254: R25.2@-8.807,8.748 -8,8.748 -8,10.335 ; R21.1@-8.705,10.335 U1.6@-4.545,10.335
REF: U3.1 U8.3 | length 3.8
  Top Layer w0.254: U3.1 -21.75,-12.525 -21.75,-14.425 U8.3
SEL_CUAD: J2.15 U5.4 | length 37.5
  Top Layer w0.254: J2.15 -53.34,0 -49.53,0 ; -32.625,-2.51 -27.152,-2.51 -26.517,-1.875 -4.35,-1.875 ; -4.25,-1.875 -4.25,-0.5 U5.4
SEL_TRIANG: J2.14 U5.2 | length 37.6
  Top Layer w0.254: J2.14 -53.34,2.54 -49.53,2.54 ; -32.625,-1.538 -28.124,-1.538 -27.8,-1.214 -27.8,0.082 -27.382,0.5 U5.2
USB_5V: C19.1 J1.8 M1.2 R29.1 U7.5 U7.6 | length 22.7
  Top Layer w0.28: U7.5@33.775,1.385 U7.6 34.49,1.85 34.49,5.875 M1.2@35.837,5.875 ; C19.1 37,9.25 37,7.65 ; M1.2 38.525,5.898 38.525,4.35 R29.1@37.625,4.35 ; 37,5.898 37,7.65 ; J1.8 41.95,7.65 37,7.65
pads on no net: J1.2 J1.3 J1.4 J1.5 J1.6 J1.7 J3.6 U4.16 U4.17 U7.12 U7.20 Y1.1

## Polygon pours and split planes (outlines as drawn)
NetD2_1 on Top Layer "NetD2_1" (solid, remove dead copper, pour order 24): 30.275,1.1 30.275,3.35 31.3,3.35 31.275,3.35 31.275,6.85 26.525,6.85 26.525,1.1 30.275,1.1
NetD1_2 on Top Layer "NetD1_2" (solid, remove dead copper, pour order 30): 32.9,-0.525 37.15,-0.525 37.15,-5.4 32.9,-5.4
AGND on Top Layer "AGND" (solid, remove dead copper, shelved, pour order 34): 48.275,-10.525 48.275,12.225 42.15,12.225 14.15,12.225 14.15,-13.65 48.275,-13.65
AGND on Bottom Layer "AGND" (solid, remove dead copper, shelved, pour order 7): 46,18.5 46,-18.5 -57.5,-18.5 -57.5,18.5

## Keep-outs
Keep-Out Layer:
  lines w0.127: -57,-18 45.5,-18 45.5,18 -57,18 -57,-18

## Silkscreen, mask and mechanical layers (free items; w line width, h text height)
Mechanical 1:
  lines w0.127: -57.5,-18.5 46,-18.5 46,18.5 -57.5,18.5 -57.5,-18.5